# Allegro board sert_v1.brd
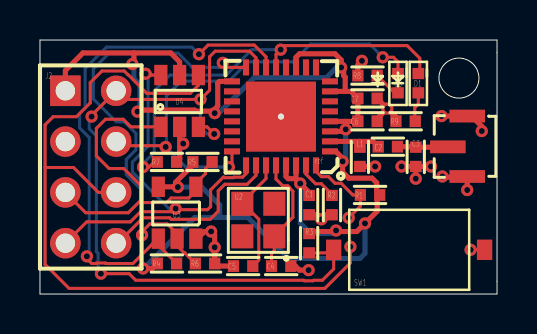
[diagram p0: board, top side]
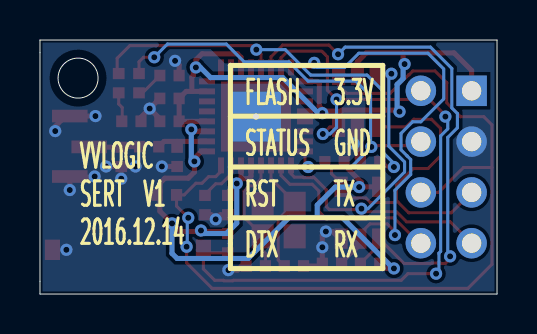
[diagram p1: board, bottom side, seen from below]

Outline 22.86 x 12.7 mm; copper layers: TOP, BOTTOM. Coordinates in mm from the lower left corner of the outline.
Outline path: circle c20.96,10.8 r1 ; 0,12.7 0,0 22.86,0 22.86,12.7 0,12.7

## Design rules (mm)
nets with their own width: min track width 0.254; nets GND VDD33

## Placement (name value [footprint] x y rotation side)
C1  1uF  [R0402]  13.46 4.45 90 top
C2  10pF  [R0402]  17.4 7.37 0 top
C3  2.4pF  [R0402]  18.8 6.86 90 top
C4  10pF  [R0402]  12.07 1.4 0 top
C5  10pF  [R0402]  10.16 1.4 180 top
C6  10uF  [R0402]  16.38 8.64 0 top
C7  0.1uF  [R0402]  16.38 9.78 0 top
C8  WHITE  [D0402]  17.91 10.54 270 top
D1  WHITE  [D0402]  18.92 10.54 270 top
J1  IPEX  [IPEX_3PIN]  21.59 7.37 270 top
J2  CON8A  [CON8_MINI_2]  1.27 10.16 0 top
L1  1.6nH  [R0402]  16 6.86 270 top
R1  12K  [R0402]  16.51 4.95 180 top
R2  12K  [R0402]  14.61 4.45 90 top
R3  12K  [R0402]  13.46 2.54 270 top
R4  12K  [R0402]  6.35 1.52 0 top
R5  12K  [R0402]  8.13 6.6 0 top
R6  12K  [R0402]  8.26 1.52 0 top
R7  NC  [R0402]  6.35 6.6 180 top
R8  1K  [R0402]  16.38 10.92 0 top
R9  1K  [R0402]  18.29 8.64 0 top
SW1  SW PUSHBUTTON  [KEY4MMX6MM]  18.52 2.21 0 top
U1  ESP8285  [QFN33]  14.61 11.43 180 top
U2  26MHz  [OSC2520_4PIN_2NUM]  10.92 3.68 90 top
U3  1G00  [SOT23-5]  6.86 4.06 0 top
U4  SRV05-4  [SOT23-6]  6.98 9.65 0 top

## Library data of the parts
C1-C7 = CAP NP
C8 D1 = LED
J1 = CON3
J2 = CON8A
L1 = CHOKE
R1-R9 = RESISTOR
SW1 = SW PUSHBUTTON
U1 = esp8285
U2 = CRYSTAL
U3 = 74AHCT1G00/SOT_1
U4 = SRV05-4

## Footprints (pads in the part's own frame, mm; a bottom-side part is the same pattern mirrored in y, then rotated)
CON8_MINI_2
  rect 1.524x1.524 hole 0.965: 1(0,0)
  round 1.524 hole 0.965: 2(2.54,0) 3(0,-2.54) 4(2.54,-2.54) 5(0,-5.08) 6(2.54,-5.08) 7(0,-7.62) 8(2.54,-7.62)
D0402
  rect 0.559x0.584 smd: 1(-0.483,0) 2(0.483,0)
IPEX_3PIN
  rect 0.635x1.778 smd: 1(0.01,-1.19) 2(-1.53,-0.22) 3(1.49,-0.22)
KEY4MMX6MM
  rect 0.762x1.016 smd: 1(-3.828,0) 2(3.721,0)
OSC2520_4PIN_2NUM
  rect 1.2x1.1 smd: (-0.8,0.8) (0.83,-0.8) 1(-0.8,-0.8) 2(0.83,0.8)
QFN33
  rect 0.8x0.3 smd: 1(0.1,4.3) 2(0.1,3.8) 3(0.1,3.3) 4(0.1,2.8) 5(0.1,2.3) 6(0.1,1.8) 7(0.1,1.3) 8(0.1,0.8) 17(5,0.8) 18(5,1.3) 19(5,1.8) 20(5,2.3) 21(5,2.8) 22(5,3.3) 23(5,3.8) 24(5,4.3)
  rect 0.3x0.8 smd: 9(0.8,0.1) 10(1.3,0.1) 11(1.8,0.1) 12(2.3,0.1) 13(2.8,0.1) 14(3.3,0.1) 15(3.8,0.1) 16(4.3,0.1) 25(4.3,5) 26(3.8,5) 27(3.3,5) 28(2.8,5) 29(2.3,5) 30(1.8,5) 31(1.3,5) 32(0.8,5)
  rect 3.5x3.5 hole 0.305: 33(2.55,2.56)
R0402
  rect 0.559x0.584 smd: 1(-0.483,0) 2(0.483,0)
SOT23-5
  rect 0.66x1.016 smd: 1(-0.94,-1.295) 2(0,-1.295) 3(0.94,-1.295) 4(0.94,1.295) 5(-0.94,1.295)
SOT23-6
  rect 0.66x1.016 smd: 1(-0.94,-1.295) 2(0,-1.295) 3(0.94,-1.295) 4(0.94,1.295) 5(0,1.295) 6(-0.94,1.295)

## Nets
GND: C1.1 C3.1 C4.2 C5.2 C6.2 C7.2 J1.2 J1.3 J2.3 L1.2 R2.1 R6.2 R7.1 R8.1 R9.1 SW1.2 U1.33(GND) U3.3(GND) U4.2(G)
VDD33: C1.2 C6.1 C7.1 J2.1 R1.1 R3.1 R4.1 R5.1 U1.1(VDDA#1) U1.3(VDD3P3#3) U1.4(VDD3P3#4) U1.7(CHIP_PU) U1.11(VDDPST#11) U1.17(VDDPST#17) U1.29(VDDD) U1.30(VDDA#30) U3.5(VCC) U4.5(V)
DTX: J2.8 U1.26(UART0_TX)
GPIO0: J2.2 R3.2 SW1.1 U1.15(GPIO0) U4.3(IO2)
LED2: D1.1(ANODE) R7.2 U1.13(GPIO15/MTDO)
RST: J2.6 R1.2 U1.32(R\S\T\) U4.4(IO3)
RX: J2.7 U1.25(UART0_RX) U4.6(IO4)
STATUS: C8.1(ANODE) J2.4 U1.24(GPIO5)
TX1: R4.2 U1.14(GPIO2/UART1_TX) U3.1(INA)
TXEN: R6.1 U1.16(GPIO4) U3.2(INB)
N16146810: C2.1 L1.1 U1.2(LNA)
N16293065: C2.2 C3.2 J1.1
N16728208: R2.2 U1.31(RES12K)
N16728619: C4.1 U1.28(XIN) U2.1
N16728623: C5.1 U1.27(XOUT) U2.2
N16730226: J2.5 R5.2 U3.4(OUTY) U4.1(IO1)
N16734055: C8.2(CATHODE) R8.2
N16735253: D1.2(CATHODE) R9.2

Pads without a net: U1 5 6 8 9 10 12 18 19 20 21 22 23

## Via types
v1: diameter 0.61, hole 0.305, TOP to BOTTOM, 44 vias

## Routing (per net, layer and track width the routed paths; a pad name or vN(x,y) marks a point on that pad's centre or on a via; arc(x,y) is an arc through that point)
GND: length 19
  TOP w0.152: SW1.2 v1(21.54,2.21)
  TOP w0.254: v1(16.1,11.66) 15.9,11.46 R8.1 ; C7.2 v1(17.37,9.27) ; v1(17.37,9.27) 17.81,8.84 R9.1 ; v1(17.37,9.27) 16.87,8.76 C6.2 ; v1(13.44,1.19) 12.98,1.19 12.78,1.4 C4.2 ; U3.3 7.87,2.77 8.23,3.12 v1(8.56,3.12) 8.74,2.95 v1(8.74,2.34) R6.2 8.86,1.4 C5.2 ; C3.1 v1(18.08,6.38) ; C3.1 v1(19.56,6.38) ; C3.1 v1(18.8,5.77) ; R7.1 6.98,6.76 6.98,7.34 v1(7.16,7.52) 6.98,7.7 U4.2 ; R2.1 14.3,3.96 v1(14.07,3.73) 13.84,3.96 C1.1 ; v1(22.1,8.15) 22.1,8.38 21.58,8.9 J1.2 v1(20.09,8.9) ; v1(21.37,5.2) J1.3 21.34,5.84 20.16,5.84 v1(20.13,5.88) ; L1.2 v1(16.76,6.38)
VDD33: length 73
  TOP w0.152: 16.87,4.83 R1.1
  TOP w0.254: 4.7,12.05 4.7,11.66 4.62,11.58 v1(4.62,11.5) ; 4.7,12.05 6.54,12.05 6.98,11.61 U4.5 ; 4.7,12.05 2.15,12.05 1.27,11.18 J2.1 ; U1.3 15.19,8.13 v1(15.29,8.23) 15.29,8.6 15.27,8.63 ; U1.7 15.27,10.13 ; 15.27,10.13 15.55,10.13 C7.1 C6.1 15.89,8.63 15.27,8.63 ; 15.27,10.13 15.27,10.85 15.19,10.92 15.19,11.2 v1(15.06,11.33) 15.06,11.7 14.76,12.01 12.98,12.01 12.81,11.84 U1.11 ; v1(4.88,9.12) 4.95,9.19 7.73,9.19 7.78,9.14 8.64,9.14 8.64,9.14 ; 8.64,9.14 8.89,9.39 8.89,10.54 8.98,10.63 U1.17 ; 8.64,9.14 v1(8.74,9.04) ; R1.1 16.84,5.11 16.84,5.56 16.61,5.79 15.44,5.79 15.14,6.1 v1(15.14,6.63) 15.14,6.78 14.79,7.13 U1.1 ; U3.5 6.68,5.36 6.78,5.46 ; 12.78,5.77 12.42,5.77 12.31,5.88 U1.29 ; 12.78,5.77 v1(13.02,5.52) 13.46,5.08 C1.2 13.46,4.93 ; 12.78,5.77 12.81,5.79 U1.30 ; v1(5.16,1.28) 5.62,1.28 R4.1 ; R3.1 13.56,3.12 14.76,3.12 v1(14.81,3.18) 14.86,3.12 15.85,3.12 v1(16.26,3.53) 16.87,4.14 16.87,4.83 ; U1.4 15.27,8.63 ; 6.78,5.46 6.78,5.59 7.65,6.45 R5.1 ; 6.78,5.46 v1(6.9,5.35)
  BOTTOM w0.254: v1(6.9,5.35) 8.09,5.35 8.99,4.45 8.99,3.83 ; v1(4.62,11.5) 4.7,11.42 4.7,10.77 5,10.47 5,9.24 v1(4.88,9.12) ; 8.99,3.83 10.4,3.83 12.45,1.78 16,1.78 16.26,2.03 v1(16.26,3.53) ; 8.99,3.83 7.74,3.83 5.19,1.28 v1(5.16,1.28) ; v1(8.74,9.04) 8.94,9.04 10.72,10.82 14.33,10.82 14.83,11.33 v1(15.06,11.33) ; v1(15.14,6.63) 15.29,6.78 v1(15.29,8.23) ; v1(14.81,3.18) 14.66,3.02 13.54,3.02 13.02,3.54 v1(13.02,5.52)
DTX: length 9.6
  TOP w0.152: U1.26 10.81,5.93 10.36,5.49 9.24,5.49 8.92,5.16 8.92,4.14 8.51,3.73 6.56,3.73 6.48,3.81 5.16,3.81 4.14,2.79 4.06,2.79 J2.8
GPIO0: length 37.2
  TOP w0.152: v1(2.58,8.87) 2.58,8.93 J2.2 4.24,9.73 v1(8.03,9.73) 8.48,10.19 8.48,11.86 8.76,12.14 10.47,12.14 10.81,11.81 U1.15 ; R3.2 14.54,2.06 SW1.1 14.69,1.25 14.12,0.69 13.68,0.69 13.66,0.66 13.22,0.66 13.19,0.69 4.79,0.69 4.46,1.02 v1(3.05,1.02) ; v1(8.71,8) 8.36,8.36 U4.3
  BOTTOM w0.152: v1(3.05,1.02) 2.9,1.16 2.9,2.04 2.82,2.13 2.82,7.9 2.46,8.26 2.46,8.75 v1(2.58,8.87) ; v1(8.03,9.73) 8.03,8.33 8.36,8 v1(8.71,8)
LED2: length 21.1
  TOP w0.152: v1(5.16,6.35) 5.46,6.35 5.72,6.6 R7.2 ; D1.1 19,11.1 19,11.79 18.36,12.42 12.24,12.42 v1(12.04,12.22) 11.81,11.98 U1.13
  BOTTOM w0.152: v1(5.16,6.35) 5.16,6.53 5.72,7.09 5.72,10.16 6.5,10.95 9.32,10.95 10.59,12.22 v1(12.04,12.22)
RST: length 44.5
  TOP w0.152: J2.6 2.92,5.08 1.68,6.32 0.25,6.32 ; 0.25,6.32 0.25,8.46 0.66,8.86 1.82,8.86 2.51,9.56 2.51,10.57 3.1,11.15 4.21,11.15 4.4,10.96 4.41,10.96 5.34,10.03 7.52,10.03 7.92,10.44 U4.4 ; 0.25,6.32 0.25,1.48 1.46,0.28 14.25,0.28 15.53,1.56 v1(15.53,2.36) ; v1(15.44,3.81) 16.03,4.39 R1.2 15.65,4.95 15.06,5.54 14.76,5.54 14.43,5.87 14.07,5.87 13.81,6.13 U1.32
  BOTTOM w0.152: v1(15.53,2.36) 15.49,2.39 15.49,3.76 v1(15.44,3.81)
RX: length 20.4
  TOP w0.152: J2.7 2.34,3.61 4.52,3.61 5.03,4.11 6.63,4.11 v1(6.78,4.27) 6.83,4.22 8.38,4.22 8.53,4.37 8.53,5.21 9.17,5.84 9.2,5.84 9.23,5.82 9.67,5.82 9.7,5.84 10.13,5.84 10.31,6.01 U1.25 ; v1(5.28,11.01) 5.52,11.01 5.59,10.95 U4.6
  BOTTOM w0.152: v1(5.28,11.01) 5.41,10.89 5.41,7.39 4.62,6.6 4.62,6.1 6.45,4.27 v1(6.78,4.27)
STATUS: length 23.3
  TOP w0.152: J2.4 4.01,7.42 6.35,7.42 v1(6.29,7.35) ; v1(9.45,6.35) 9.61,6.51 U1.24 ; v1(17.15,11.84) 17.68,11.84 17.91,11.61 C8.1
  BOTTOM w0.152: v1(17.15,11.84) 16.48,12.5 13.54,12.5 12.65,11.61 10.41,11.61 9.45,10.64 7.06,10.64 6.32,9.91 6.32,7.39 v1(6.29,7.35) 7.29,6.35 v1(9.45,6.35)
TX1: length 26.2
  TOP w0.152: 8,11.99 v1(7.95,11.99) 8.41,12.45 10.72,12.45 11.31,11.86 U1.14 ; 5.92,2.52 5.64,2.52 4.65,1.52 3.29,1.52 3.27,1.55 2.83,1.55 2.8,1.52 2.59,1.52 2.44,1.68 2.44,1.79 v1(2.35,1.88) ; 5.92,2.52 5.92,2.51 5.92,2.44 R4.2 ; 5.92,2.52 5.92,2.52 U3.1
  BOTTOM w0.152: v1(7.95,11.99) 7.59,12.34 3.33,12.34 2.26,11.28 2.26,9.3 1.98,9.02 1.98,8.31 2.46,7.83 2.46,2 v1(2.35,1.88)
TXEN: length 22.7
  TOP w0.152: v1(5.11,2.95) 5.11,3.12 5.49,3.51 6.36,3.51 6.86,3.01 U3.2 6.86,2.41 7.21,2.06 7.24,2.06 R6.1 ; v1(9.14,11.56) 9.14,11.48 9.3,11.33 U1.16
  BOTTOM w0.152: v1(9.14,11.56) 9.14,11.48 8.99,11.33 7.62,11.33 6.91,12.04 3.45,12.04 2.67,11.25 2.67,9.75 3.81,8.61 4.22,8.61 4.8,8.03 4.8,7.21 4.5,6.91 4.32,6.73 4.32,5.97 5.11,5.19 v1(5.11,2.95)
N16146810: length 2.8
  TOP w0.254: 16,7.63 16.65,7.63 C2.1 ; 16,7.63 L1.1 ; 16,7.63 U1.2
N16293065: length 2.5
  TOP w0.254: C2.2 18.77,7.37 C3.2 20.38,7.34 J1.1
N16728208: length 2.2
  TOP w0.152: R2.2 14.61,4.98 14.07,5.51 13.78,5.51 13.31,5.99 U1.31
N16728619: length 6
  TOP w0.152: U1.28 11.81,5.75 12.14,5.41 12.4,5.41 12.48,5.32 12.48,5.3 12.65,5.14 12.65,3.84 11.72,2.91 U2.1 11.72,2.17 11.58,2.03 C4.1
N16728623: length 6
  TOP w0.152: C5.1 10.94,1.7 10.94,3.74 10.17,4.51 U2.2 10.12,4.58 11.31,5.77 U1.27
N16730226: length 17.8
  TOP w0.152: U4.1 4.55,8.36 4.17,8.74 3.28,8.74 2.82,8.28 2.82,6.91 3.45,6.27 4.19,6.27 5.03,5.44 5.03,4.67 ; 5.03,4.67 5.13,4.57 6.33,4.57 6.56,4.8 7.44,4.8 7.8,5.16 U3.4 7.8,5.54 8.28,6.02 8.28,6.27 R5.2 ; 5.03,4.67 4.42,4.06 2.29,4.06 J2.5
N16734055: length 1.4
  TOP w0.152: R8.2 17.73,10.06 C8.2
N16735253: length 1.5
  TOP w0.152: R9.2 18.75,8.66 18.75,9.32 18.92,9.5 D1.2

## Copper pours and planes (outline as drawn; the poured copper is in the pictures)
GND on BOTTOM: 0.13,0.13 0.13,12.57 22.73,12.57 22.73,0.13 ; 7 cut-outs

## Text on the board
Ref Des/Silkscreen Bottom: 3.3V | GND | TX | RX | FLASH | STATUS | RST | DTX | V1 | VVLOGIC | SERT | 2016.12.14
